# Altium PCB Tesis_Driver_TMC2209.PcbDoc
Units mm, origin at the board's own origin, x right, y up, seen from the top; angles counter-clockwise.
Board outline 100 x 100 mm, 2 copper layers (Top Layer, Bottom Layer); 17 components, 25 nets, 126 pads, 22 vias.
Unrouted connection lines stored in the file: 12.
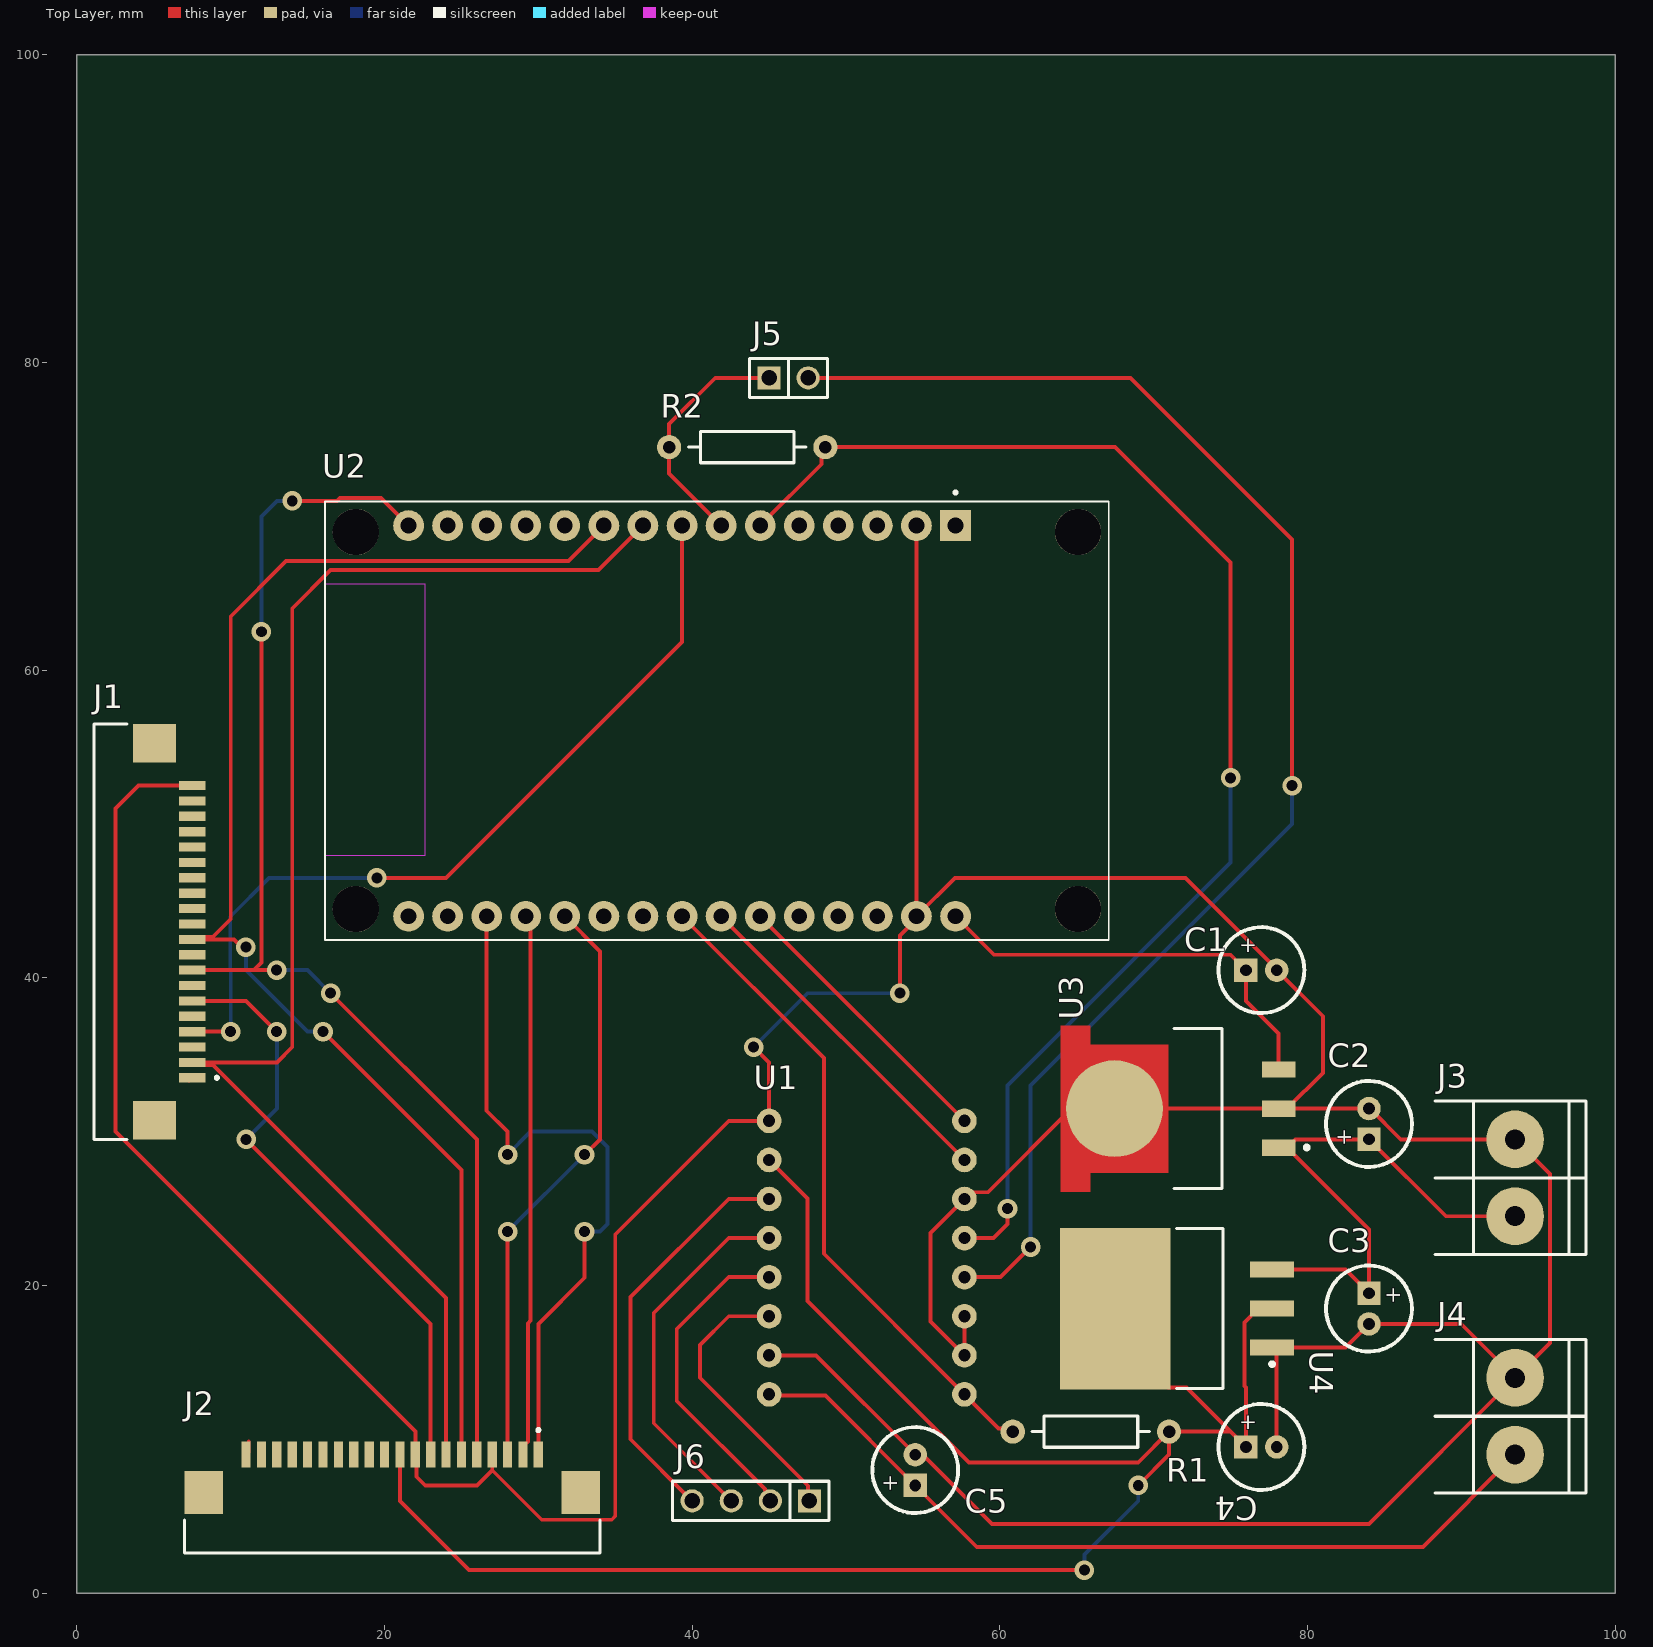
[diagram p0: Top Layer view]
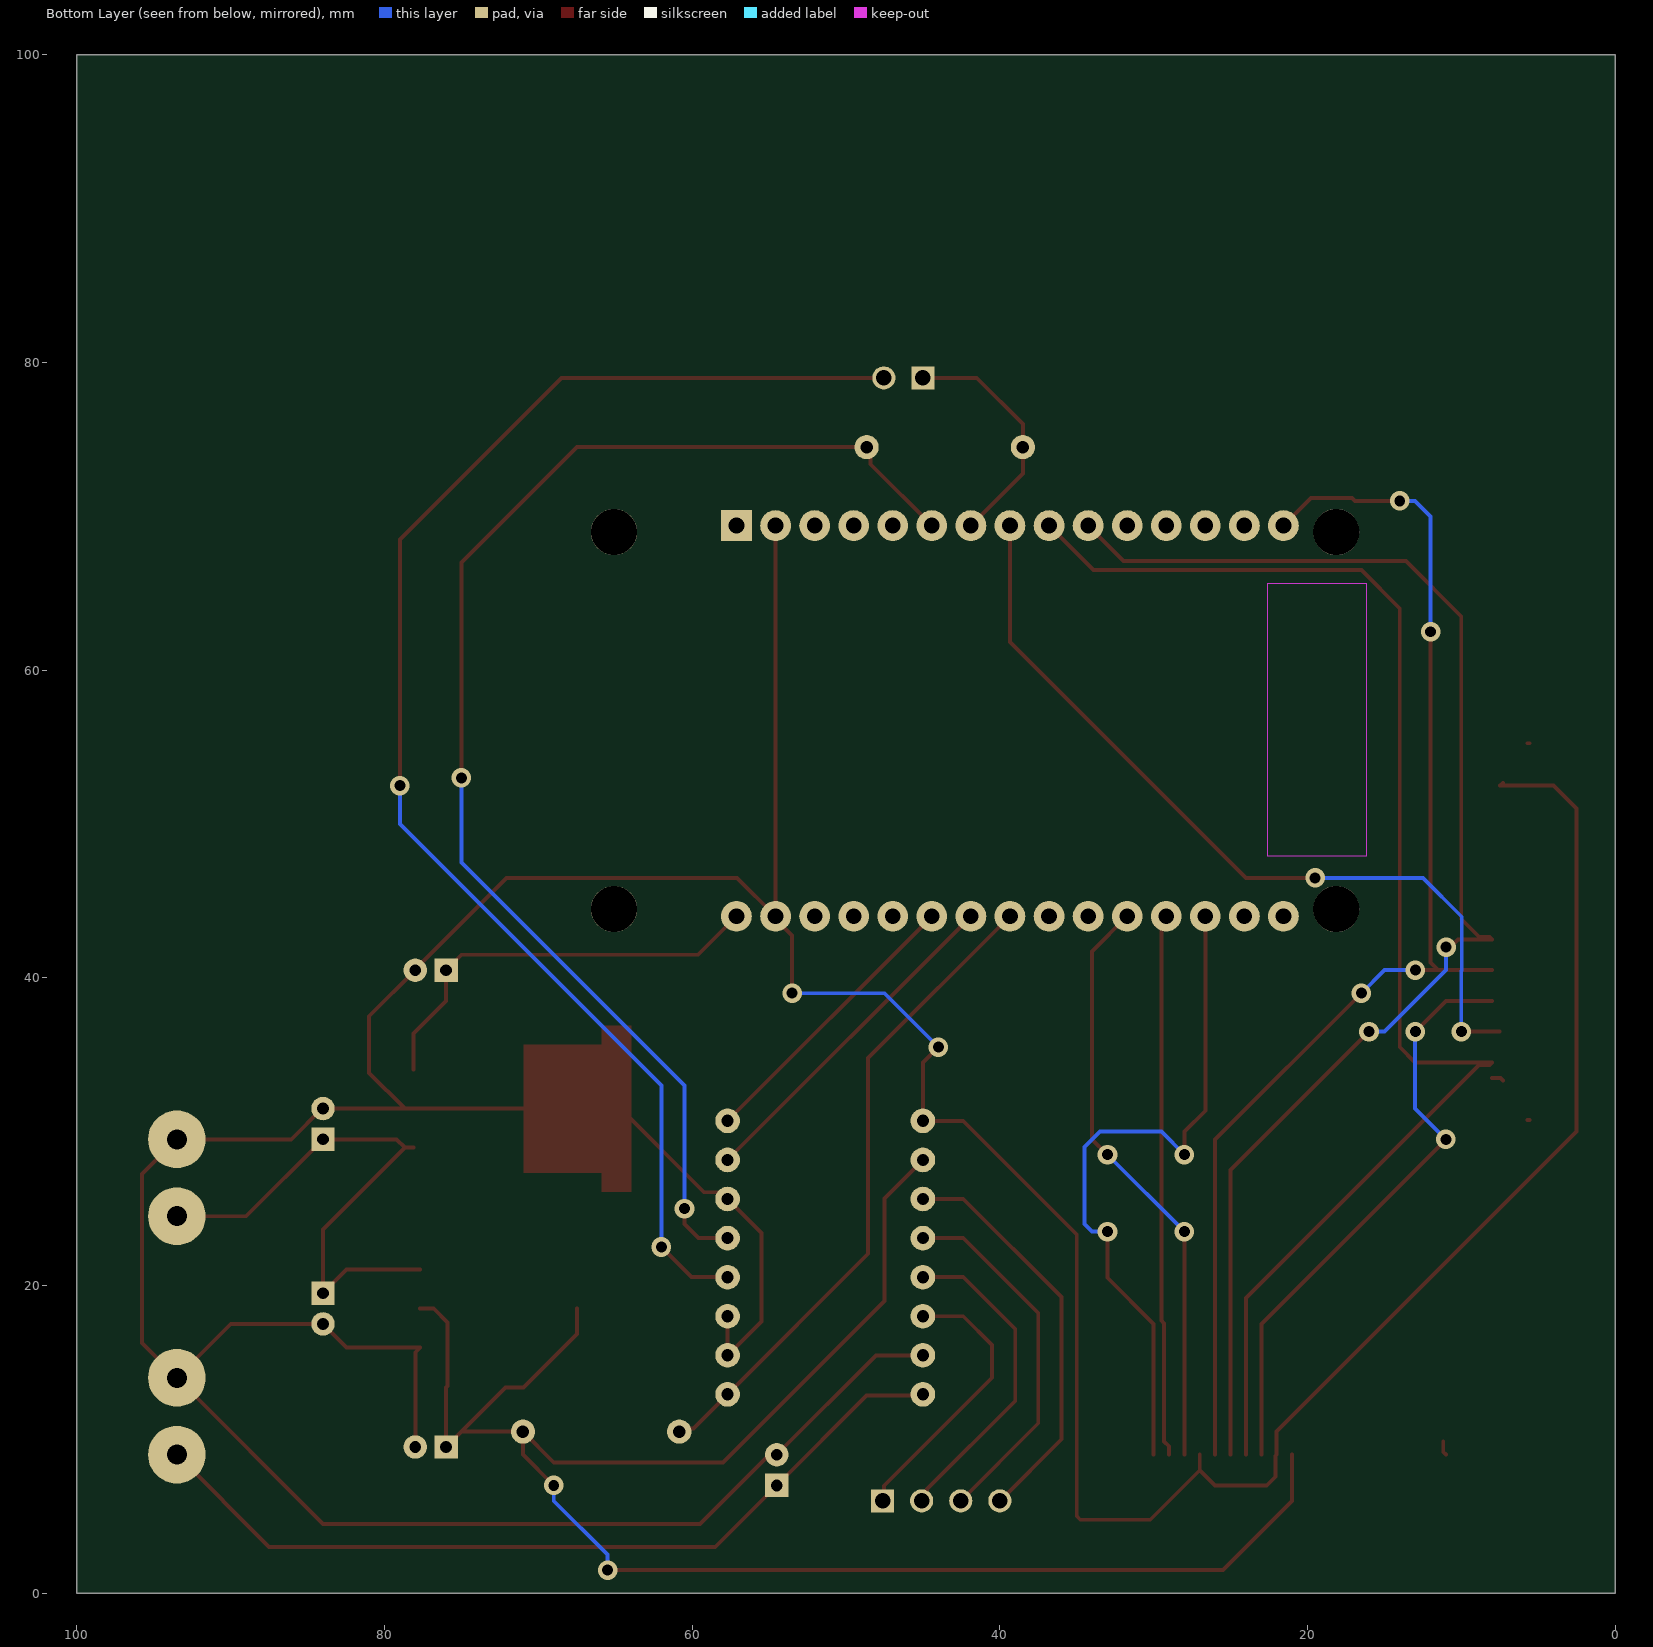
[diagram p1: Bottom Layer view, seen from below]
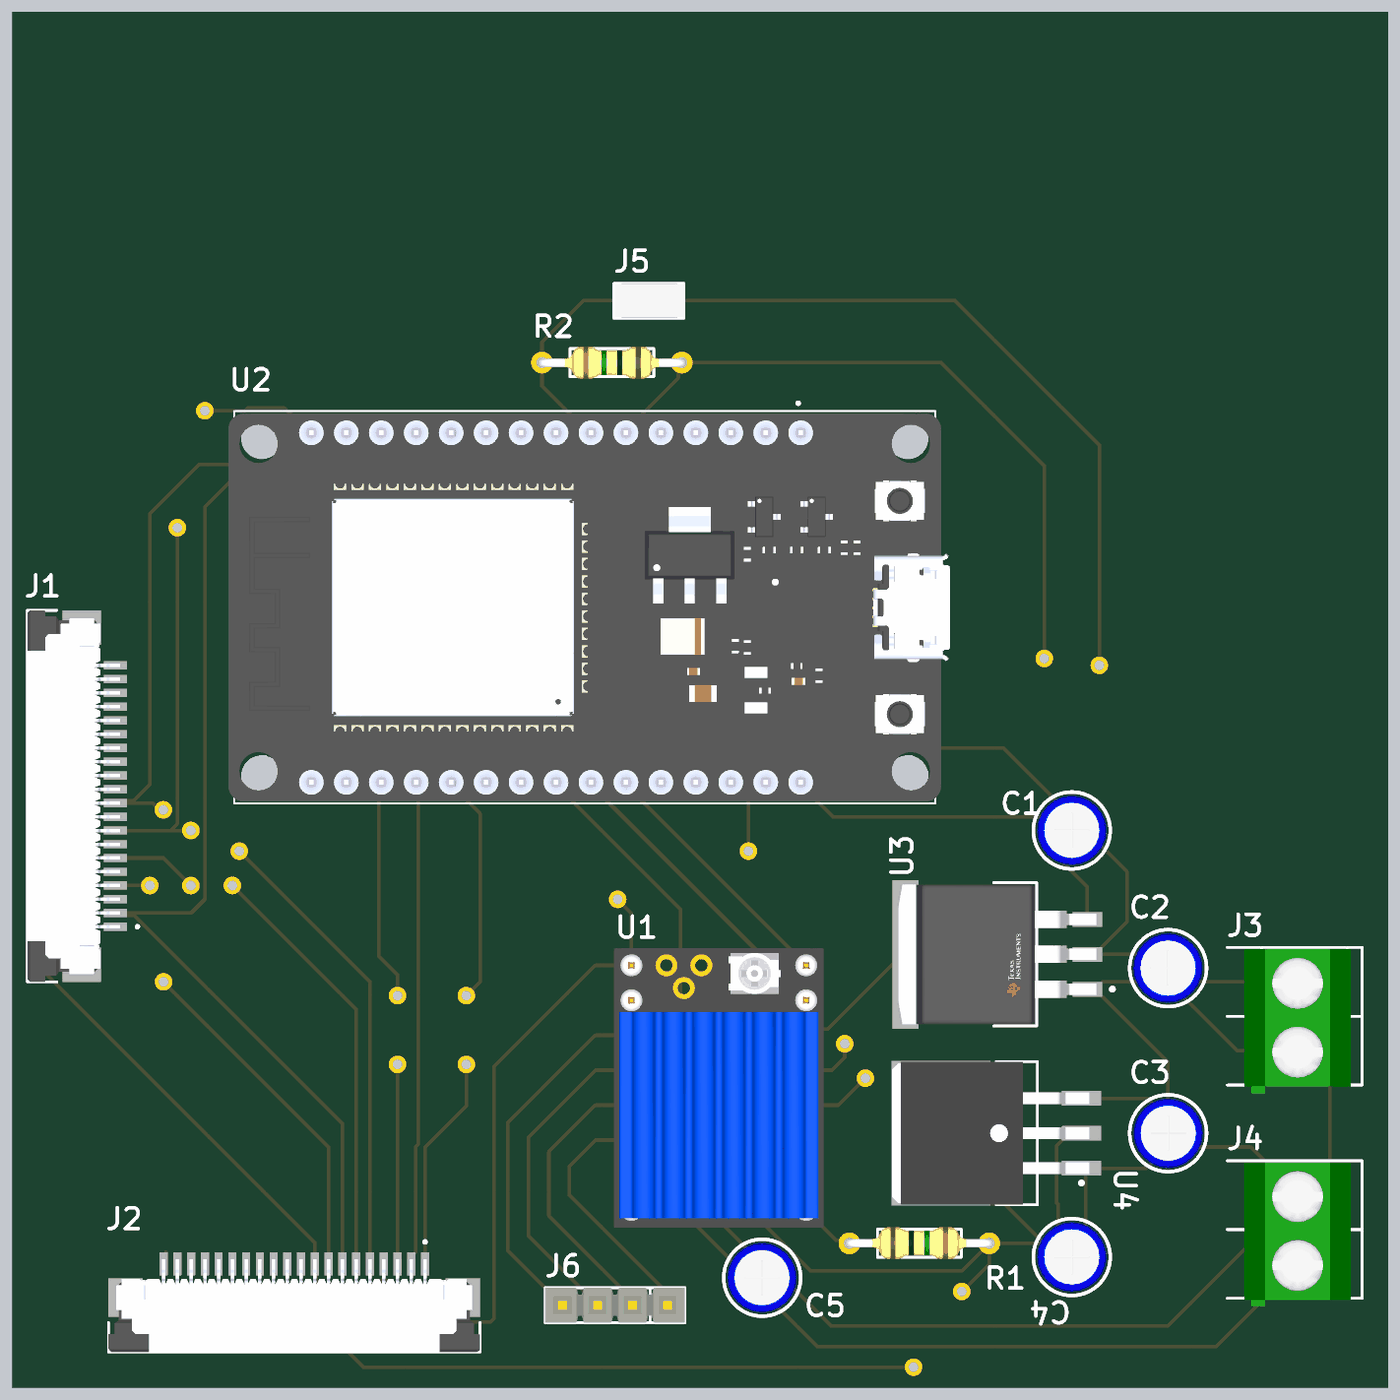
[diagram p2: 3D render of the assembled board from above, using the file's embedded part models]

## Layer stack, top to bottom
Top Solder: solder mask 0.0102, Solder Resist, Dk 3.5
Top Layer: signal copper 0.0356
Dielectric 1: dielectric 0.32, FR-4, Dk 4.8
Bottom Layer: signal copper 0.0356
Bottom Solder: solder mask 0.0102, Solder Resist, Dk 3.5

## Board outline
0,0 100,0 100,100 0,100

## Design rules (kind name [scope] priority, off if disabled: settings)
Clearance [All] p1: gap=0.254 ignorepadtopadclearanceinfootprint=FALSE
PolygonConnect [All] p1: connectstyle=Relief reliefconductorwidth=0.254 reliefentries=4 polygonreliefangle="90 Angle" airgapwidth=0.254
RoutingVias [All] p1: holewidth=0.711 width=1.27 viastyle="Through Hole" minholewidth=0.711 minwidth=1.27 maxholewidth=0.711 maxwidth=1.27
ShortCircuit [All] p1: allowed=TRUE
SolderMaskExpansion [All] p1: expansion=0 istentingtop=FALSE
SupplyNets "Schematic Supply Nets_1" [InNet('GND')] p1: voltage=0.000
SupplyNets "Schematic Supply Nets" [InNet('3V3')] p2: voltage=0.000
Width [All] p1: maxlimit=0.254 minlimit=0.254 preferedwidth=0.254
29 further rules are at their usual default settings.

## Components (designator, comment, footprint, x,y, rotation, side; value= is the part's Value field where it differs from the comment)
C1 "10u" CAP100RP 77,40.5 r0 top
C2 "10u" CAP100RP 84,30.5 r90 top
C3 "10u" CAP100RP 84,18.5 r270 top
C4 "10u" CAP100RP 77,9.5 r0 top
C5 "100u" CAP100RP 54.5,8 r90 top
J1 "FFC3B11-20-T" GCT_FFC3B11-20-T 5.05,43 r270 top
J2 "FFC3B11-20-T" GCT_FFC3B11-20-T 20.5,6.55 r0 top
J3 "7V" BORNERA2 93.5,27 r180 top
J4 "V_MOT (5.5-28v)" BORNERA2 93.5,11.5 r180 top
J5 "JUMPER" JUMPER2 46.27,79 r0 top
J6 "CON4" SIP4 43.81,6 r180 top
R1 "10k" RES400 60.84,10.5 r0 top
R2 "1k" RES400 48.66,74.5 r180 top
U1 "TMC2209" TMC2209 57.7,12.92 r180 top
U2 "ESP32-DEVKIT-V1" MODULE_ESP32_DEVKIT_V1 41.605,56.7 r270 top
U3 "LM7805SX/NOPB" FP-KTT0003B-MFG 70,31.5 r90 top
U4 "LMS1587CS-3.3/NOPB" KTT0003B_N 71.5,18.5 r180 top

## Footprints (in the part's own frame and the unit in brackets; to place one, negate y for a bottom-side part, rotate by r counter-clockwise, add the part's x,y. Pads: shape width x height; smd on the part's side, far side on the other; paste and mask are expansions set on the pad)
BORNERA2 [mm] "Bornera con Tornillos 5mm separación"
  round 3.75 hole 1.3: 1(0,2.5) 2(0,-2.5)
  silkscreen extent -4.6,-5 5.2,5, body extent -3.76,-4.89 3.94,5.61, height 10
CAP100RP [mil] "Body diameter 5mm"
  rect 60x60 hole 30: 1(-39.37,0)
  round 60 hole 30: 2(39.37,0)
  silkscreen extent -110,-110 110,110, body extent -99,-99 99,100, height 454
FP-KTT0003B-MFG [mm]
  rect 1.07x2.16 smd paste+0 mask+0: 1(-2.54,-8.13) 2(0,-8.13) 3(2.54,-8.13)
  round 6.291 smd paste+0 mask+0: 4(0,2.545)
  Top Layer region: -5.4,6.04 5.4,6.04 5.4,4.13 4.165,4.13 4.165,-0.95 -4.165,-0.95 -4.165,4.13 -5.4,4.13 -5.4,6.04
  silkscreen extent -5.21,-10.08 5.21,-1.33, body extent -5.08,-8.78 5.08,5.6, height 4.79
GCT_FFC3B11-20-T [mm]
  rect 0.6x1.7 smd: 1(9.5,2.45) 2(8.5,2.45) 3(7.5,2.45) 4(6.5,2.45) 5(5.5,2.45) 6(4.5,2.45) 7(3.5,2.45) 8(2.5,2.45) 9(1.5,2.45) 10(0.5,2.45) 11(-0.5,2.45) 12(-1.5,2.45) 13(-2.5,2.45) 14(-3.5,2.45) 15(-4.5,2.45) 16(-5.5,2.45) 17(-6.5,2.45) 18(-7.5,2.45) 19(-8.5,2.45) 20(-9.5,2.45)
  rect 2.5x2.8 smd: S1(12.25,0) S2(-12.25,0)
  silkscreen extent -13.5,-3.95 13.5,4.15, body extent -13.5,-3.95 13.5,2.8, height 2.5
JUMPER2 [mm]
  rect 1.5x1.5 hole 1.016: 1(-1.27,0)
  round 1.5 hole 1.016: 2(1.27,0)
  silkscreen extent -2.54,-1.27 2.54,1.27, body extent -2.46,-1.27 2.54,1.27, height 9.5
KTT0003B_N [mm] "D2-PAK, 3-Leads, Body 10.41x8.89mm, Pitch 2.54mm, IPC Medium Density"
  rect 2.85x1.05 smd: 1(-6.2,2.54) 2(-6.2,0) 3(-6.2,-2.54)
  rect 7.2x10.5 smd: 4(4,0)
  silkscreen extent -6.33,-5.2 0,5.2, body extent -6.78,-5.2 7.57,5.2, height 4.64
MODULE_ESP32_DEVKIT_V1 [mm]
  rect 2x2 / inner round 2 / far side rect 2x2 hole 1.02: 1(-12.7,15.515)
  round 2 hole 1.02: 2(-12.7,12.975) 3(-12.7,10.435) 4(-12.7,7.895) 5(-12.7,5.355) 6(-12.7,2.815) 7(-12.7,0.275) 8(-12.7,-2.265) 9(-12.7,-4.805) 10(-12.7,-7.345) 11(-12.7,-9.885) 12(-12.7,-12.425) 13(-12.7,-14.965) 14(-12.7,-17.505) 15(-12.7,-20.045) 16(12.7,-20.045) 17(12.7,-17.505) 18(12.7,-14.965) 19(12.7,-12.425) 20(12.7,-9.885) 21(12.7,-7.345) 22(12.7,-4.805) 23(12.7,-2.265) 24(12.7,0.275) 25(12.7,2.815) 26(12.7,5.355) 27(12.7,7.895) 28(12.7,10.435) 29(12.7,12.975) 30(12.7,15.515)
  round 3 hole 3 unplated: ""(-12.28,23.475) ""(-12.28,-23.475) ""(12.23,23.475) ""(12.23,-23.475)
  Keep-Out Layer region: 8.78,-25.475 -8.91,-25.475 -8.91,-18.985 8.78,-18.985
  Keep-Out Layer region: 8.78,-25.475 -8.91,-25.475 -8.91,-18.985 8.78,-18.985
  silkscreen extent -14.95,-25.48 14.23,25.48, body extent -14.1,-25.9 14.1,26.55, height 7.05
RES400 [mil]
  round 62 hole 32: 1(0,0) 2(400,0)
  silkscreen extent 50,-40 350,40, body extent -12,-45 412,46, height 96
SIP4 [mm]
  rect 1.5x1.5 hole 1.016: 1(-3.81,0)
  round 1.5 hole 1.016: 2(-1.27,0) 3(1.27,0) 4(3.81,0)
  silkscreen extent -5.08,-1.27 5.08,1.27, body extent -5.08,-1.27 5.08,1.27, height 8.38
TMC2209 [mm]
  round 1.6 hole 0.8: 1(0,0) 2(0,-2.54) 3(0,-5.08) 4(0,-7.62) 5(0,-10.16) 6(0,-12.7) 7(0,-15.24) 8(0,-17.78) 9(12.7,0) 10(12.7,-2.54) 11(12.7,-5.08) 12(12.7,-7.62) 13(12.7,-10.16) 14(12.7,-12.7) 15(12.7,-15.24) 16(12.7,-17.78)
  body extent -1.27,-19.05 13.97,1.27, height 17.87

## Part data
C1 C2 C3 C4 C5: library part CAPPOL
J1 J2: "20 Position FFC, FPC Connector Contacts, Top 0.039 (1.00mm) Surface Mount, Right Angle", Package=None, Check_prices=https://www.snapeda.com/parts/FFC3B11-20-T/Global+Connector+Technology/view-part/?ref=eda, MF="Global Connector Technology", MP=FFC3B11-20-T, SnapEDA_Link=https://www.snapeda.com/parts/FFC3B11-20-T/Global+Connector+Technology/view-part/?ref=snap
J3 J4: library part "BORNERA 2"
R1 R2: library part RES
U2: "Dual core, Wi-Fi: 2.4 GHz up to 150 Mbits/s,BLE (Bluetooth Low Energy) and legacy Bluetooth, 32 bits, Up to 240 MHz", Package=None, Check_prices=https://www.snapeda.com/parts/ESP32-DEVKIT-V1/Do+it/view-part/?ref=eda, MF="Do it", MP=ESP32-DEVKIT-V1, SnapEDA_Link=https://www.snapeda.com/parts/ESP32-DEVKIT-V1/Do+it/view-part/?ref=snap
U3: library part CMP-2000-07590-2, "IC REG LIN 5V 1.5A DDPAK/TO263-3", Ambient Temperature Range High=+125°C, Ambient Temperature Range Low=0°C, Dropout Voltage=2V, Manufacturer="Texas Instruments", Max Junction Temp=+150°C, Max Supply Voltage=30V, Min Supply Voltage=7.5V, Nominal Supply Current=8mA, Output Current=1.5A, Output Voltage=5V, Package=KTT0003B, Temperature="0°C to +125°C", Accuracy Percentage=3%, Automotive=No, Category=IC, ComponentLink2Description=Datasheet, ComponentLink2URL=http://www.ti.com/lit/ds/symlink/lm7800.pdf, Device Class L1="Integrated Circuits (ICs)", Device Class L2="Power Management ICs", Device Class L3="Voltage Regulators - Linear", Digikey Description="IC REG LIN 5V 1.5A DDPAK/TO263-3", Height=4.79mm, Lead Free=Yes, Manufacturer Part Number=LM7805SX/NOPB, Mouser Description="1.5-A, Wide VIN Fixed Voltage Regulators 3-DDPAK/TO-263 0 to 0", Number Of Outputs=1, Octopart=https://octopart.com/lm7805sx%2Fnopb-texas+instruments-74629994, Output Type=Fixed, RoHS=TRUE, Standoff Height=0mm, Temperature Range High=+125°C, Temperature Range Low=0°C
U4: library part CMP-0062-00169-5, "3A Low Dropout Fast Response Regulators, 3-pin TO-263, Pb-Free", Manufacturer="Texas Instruments", PackageTopMarking=NSUZXYTTE#*LMS1587*CS-3.3, PowerWise=N, Code_JEDEC=MO-169-AA, ComponentLink1Description="Datasheet URL", ComponentLink1URL=http://www.ti.com/general/docs/lit/getliterature.tsp?genericPartNumber=LMS1587&fileType=pdf, CompType="LDO IC", High-Reliability=Y, PackageDescription="TO-263, Molded, .400 x .390 x .180in, 3 Lead, .1in Pitch, Surface Mount", PackageReference=KTT0003B, PartNumber=LMS1587CS-3.3/NOPB, PinCount=3, RoHS=Y

## Via types
v1: diameter 1.27, hole 0.711, Top Layer to Bottom Layer, 22 vias

## Nets (pads, with @x,y where several pads share a name; then routed paths per layer and width w, separated by ;. In a path a pad name is that pad's centre, name@x,y a point inside that pad or via, vN(x,y) a via of type N, cw(c..) or ccw(c..) an arc to the next point about the centre after c; other vN are vias at no path point)
3V3: C4.1 J2.10 R1.2 U1.15 U4.2 U4.4 | length 127
  Top Layer w0.254: J2.10 21,6 25.5,1.5 v1(65.5,1.5) ; U1.15 47.5,25.66 47.5,19 58,8.5 69,8.5 R1.2 ; U4.4 67.5,16.85 70.973,13.377 72.123,13.377 75,10.5 ; v1(69,7) 71,9 R1.2 ; U4.2 76.8,18.5 75.894,17.594 75.894,13.468 76,13.361 C4.1 75,10.5 ; R1.2 75,10.5
  Bottom Layer w0.254: v1(65.5,1.5) 65.5,2.5 69,6 v1(69,7)
5V: C1.1 U2.30 U3.3 | length 27.7
  Top Layer w0.254: U2.30 59.62,41.5 75,41.5 C1.1 76,38.5 78.13,36.37 U3.3
A: J2.2 U2.19 | length 35.3
  Top Layer w0.254: J2.2 29,9.55 29.319,9.869 29.319,17.537 29.5,17.718 29.5,43.68 U2.19
A1: J6.1 U1.11 | length 18.3
  Top Layer w0.254: U1.11 42.38,18 40.5,16.12 40.5,14 47.518,6.982 47.518,6.102 J6.1
A2: J6.2 U1.12 | length 21.1
  Top Layer w0.254: U1.12 42.38,20.54 39,17.16 39,12.5 44.744,6.756 44.744,6.673 45.08,6.337 J6.2
B: J2.3 U2.20 | length 38.4
  Top Layer w0.254: J2.3 28,19 v1(28,23.5) ; U2.20 34,41.72 34,29.5 v1(33,28.5)
  Bottom Layer w0.254: v1(28,23.5) v1(33,28.5)
B1: J6.4 U1.14 | length 26.5
  Top Layer w0.254: J6.4 36,10 36,19.24 42.38,25.62 U1.14
B2: J6.3 U1.13 | length 23.8
  Top Layer w0.254: J6.3 37.5,11.04 37.5,18.2 42.38,23.08 U1.13
CS: J1.4 U2.8 | length 54.3
  Top Layer w0.254: J1.4 v1(10,36.5) ; v1(19.5,46.5) 24,46.5 39.34,61.84 U2.8
  Bottom Layer w0.254: v1(10,36.5) 10,40.453 9.968,40.485 9.968,43.968 12.5,46.5 v1(19.5,46.5)
CS_ENC: J1.6 J2.8 | length 39.1
  Top Layer w0.254: J1.6@8,38.5 10.984,38.5 v1(12.984,36.5) ; v1(11,29.5) 23,17.5 J2.8
  Bottom Layer w0.254: v1(11,29.5) 13,31.5 13,36.484 v1(12.984,36.5)
DIR: U1.8 U2.25 | length 18.8
  Top Layer w0.254: U2.25 44.42,43.99 57.7,30.71 U1.8
EN: R1.1 U1.1 U2.23 | length 42.8
  Top Layer w0.254: U2.23 48.558,34.782 48.558,22.062 U1.1 59.308,11.312 59.908,10.712 60.628,10.712 R1.1
ENC_N: J2.1 U2.18 | length 46
  Top Layer w0.254: U2.18 26.64,31.36 27.984,30.016 27.984,28.516 v1(28,28.5) ; J2.1 30,17.5 33,20.5 v1(33,23.5)
  Bottom Layer w0.254: v1(28,28.5) 29.5,30 33.5,30 34.5,29 34.5,24 34.016,23.516 33.016,23.516 v1(33,23.5)
GND: C1.2 C2.2 C3.2 C4.2 C5.2 J1.1 J1.3 J1.5 J1.7 J1.9 J1.11 J1.13 J1.15 J1.17 J1.19 J1.20 J1.S1 J1.S2 J2.4 J2.9 J3.2 J4.2 U1.2 U1.3 U1.6 U1.10 U1.16 U2.2 U2.29 U3.2 U3.4 U4.1 | length 343.5
  Top Layer w0.254: J1.S1@5.55,30.75 J1.S1@5.7,30.75 ; J1.S2@5.55,55.25 J1.S2@5.7,55.25 ; J1.1@7.277,33.327 7.45,33.5 J1.1 J1.1@8,33.5 ; J1.20@7.277,52.673 7.45,52.5 J1.20 4,52.5 2.5,51 2.5,30 22,10.5 J2.9 22.082,8.918 22.082,7.567 22.649,7 26,7 26.918,7.918 ; J2.4 27,7.989 30.22,4.769 34.769,4.769 35,5 35,23.32 42.38,30.7 U1.16 45,34.5 v1(44,35.5) ; U1.10 48.04,15.46 C5.2 ; v1(53.5,39) 53.5,42.738 54.58,43.818 U2.29 ; C5.2@54.547,9.296 55.087,8.757 55.243,8.757 59.5,4.5 84,4.5 J4.2 ; U2.2 U2.29 ; U1.3 U1.2 55.5,17.66 55.5,23.42 U1.6 58.14,26.06 59.226,26.06 64.666,31.5 U3.4 U3.2 U3.2@78.675,31.5 ; C4.2 78,15.66 U4.1 82.46,15.96 C3.2 90,17.5 J4.2 ; U2.29 57.08,46.5 72.063,46.5 78,40.563 C1.2 81,37.5 81,33.825 U3.2@78.675,31.5 ; U3.2@78.675,31.5 C2.2 84.063,31.5 86.063,29.5 J3.2 95.756,27.244 95.756,16.256 J4.2
  Bottom Layer w0.254: v1(44,35.5) 47.5,39 v1(53.5,39)
"GPIO4 (GPSLK0)": J1.12
"GPIO9 (MISO)": J1.10 J2.6 U2.10 | length 91.5
  Top Layer w0.254: v1(10.984,42) 10.725,42 10.225,42.5 8,42.5 8.173,42.673 8.862,42.673 10,43.811 10,63.5 13.599,67.099 31.959,67.099 U2.10 ; v1(16,36.5) 25,27.5 J2.6
  Bottom Layer w0.254: v1@11,42 11,40.5 15,36.5 v1(16,36.5)
"GPIO10 (MOSI)": J1.8 J2.5 U2.15 | length 83.6
  Top Layer w0.254: J1.8@8,40.5 11.5,40.5 ; v1(12,62.5) 12,41 11.5,40.5 ; v1(12.984,40.5) 11.5,40.5 ; v1(14,71) 16.918,71 17.117,71.2 19.76,71.2 U2.15 ; v1(16.5,39) 26,29.5 J2.5
  Bottom Layer w0.254: v1(12,62.5) 12,70 13,71 v1(14,71) ; v1(12.984,40.5) 15,40.5 v1(16.5,39)
"GPIO11 (SCLK)": J1.2 J2.7 U2.9 | length 92.5
  Top Layer w0.254: J2.7 24,19.189 8.862,34.327 8.173,34.327 8,34.5 13,34.5 14,35.5 14,64.019 16.481,66.5 33.9,66.5 U2.9
GPIO21: J1.14
NetC2_1: C2.1 C3.1 J3.1 U3.1 U4.3 | length 36.3
  Top Layer w0.254: U4.3 82.46,21.04 C3.1 84,23.635 U3.1@78.675,28.96 ; U3.1 U3.1@78.675,28.96 ; J3.1 89,24.5 C2.1 79.215,29.5 U3.1@78.675,28.96
NetJ5_1: J5.1 R2.2 U2.7 | length 15.7
  Top Layer w0.254: U2.7 38.5,72.78 R2.2 38.5,76 41.5,79 J5.1
NetR2_1: R2.1 U1.5 U2.6 | length 88.5
  Top Layer w0.254: U2.6 48.407,73.387 48.407,74.247 R2.1 67.5,74.5 75,67 v1(75,53) ; U1.5 59.58,23.08 60,23.5 60.5,24 v1(60.5,25)
  Bottom Layer w0.254: v1(60.5,25) 60.5,33 75,47.5 v1(75,53)
STEP: U1.7 U2.24 | length 22.4
  Top Layer w0.254: U2.24 41.88,43.99 57.7,28.17 U1.7
TX_drv: J5.2 U1.4 | length 94
  Top Layer w0.254: J5.2 68.5,79 79,68.5 v1(79,52.5) ; U1.4 60.04,20.54 v1(62,22.5)
  Bottom Layer w0.254: v1(62,22.5) 62,33 79,50 v1(79,52.5)
VM: C5.1 J4.1 U1.9 | length 55.1
  Top Layer w0.254: U1.9 45.08,12.84 48.66,12.84 C5.1 58.5,3 87.5,3 J4.1
pads on no net: J1.16 J1.18 J2.11 J2.12 J2.13 J2.14 J2.15 J2.16 J2.17 J2.18 J2.19 J2.20 J2.S1 J2.S2 U2. U2.1 U2.3 U2.4 U2.5 U2.11 U2.12 U2.13 U2.14 U2.16 U2.17 U2.21 U2.22 U2.26 U2.27 U2.28
copper on no net: | length 0.9
  Top Layer w0.254: 11,9 11.173,9.173 11.173,9.862

## Text inside footprints (layer, text, board x,y; h text height)
C1: Top Overlay "+" at 75.552,41.668 h1.02
C2: Top Overlay "+" at 82.832,29.052 h1.02 r90
C3: Top Overlay "+" at 85.168,19.948 h1.02 r270
C4: Top Overlay "+" at 75.552,10.668 h1.02
C5: Top Overlay "+" at 53.332,6.552 h1.02 r90